# Altium PCB SPI LVDS Master.PcbDoc
Units mil, origin at the board's own origin, x right, y up, seen from the top; angles counter-clockwise.
Board outline 2040 x 1580 mil, 4 copper layers (Top Layer, L2 - GND, L3 - POWER, Bottom Layer), stack 23.756 mil thick; 26 components, 29 nets, 104 pads, 29 vias.
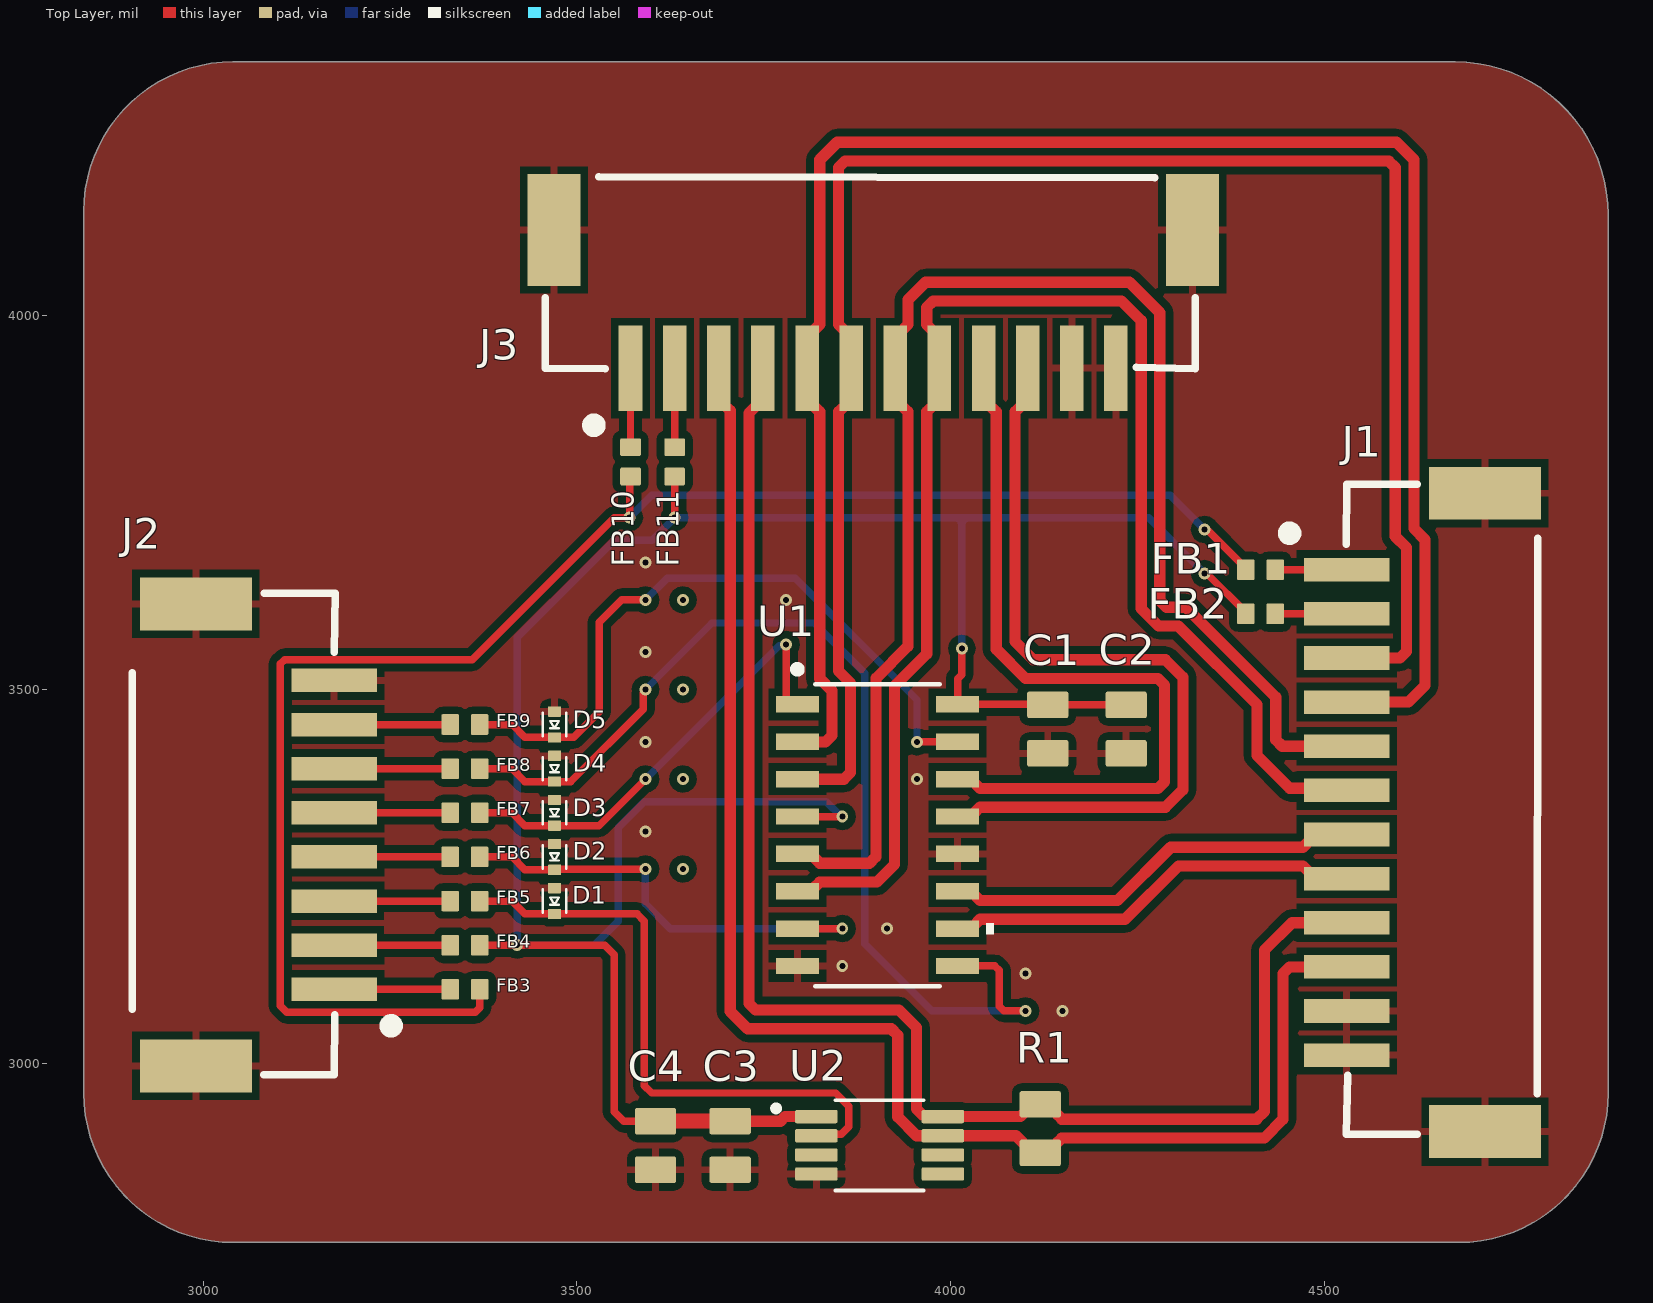
[diagram p0: Top Layer view]
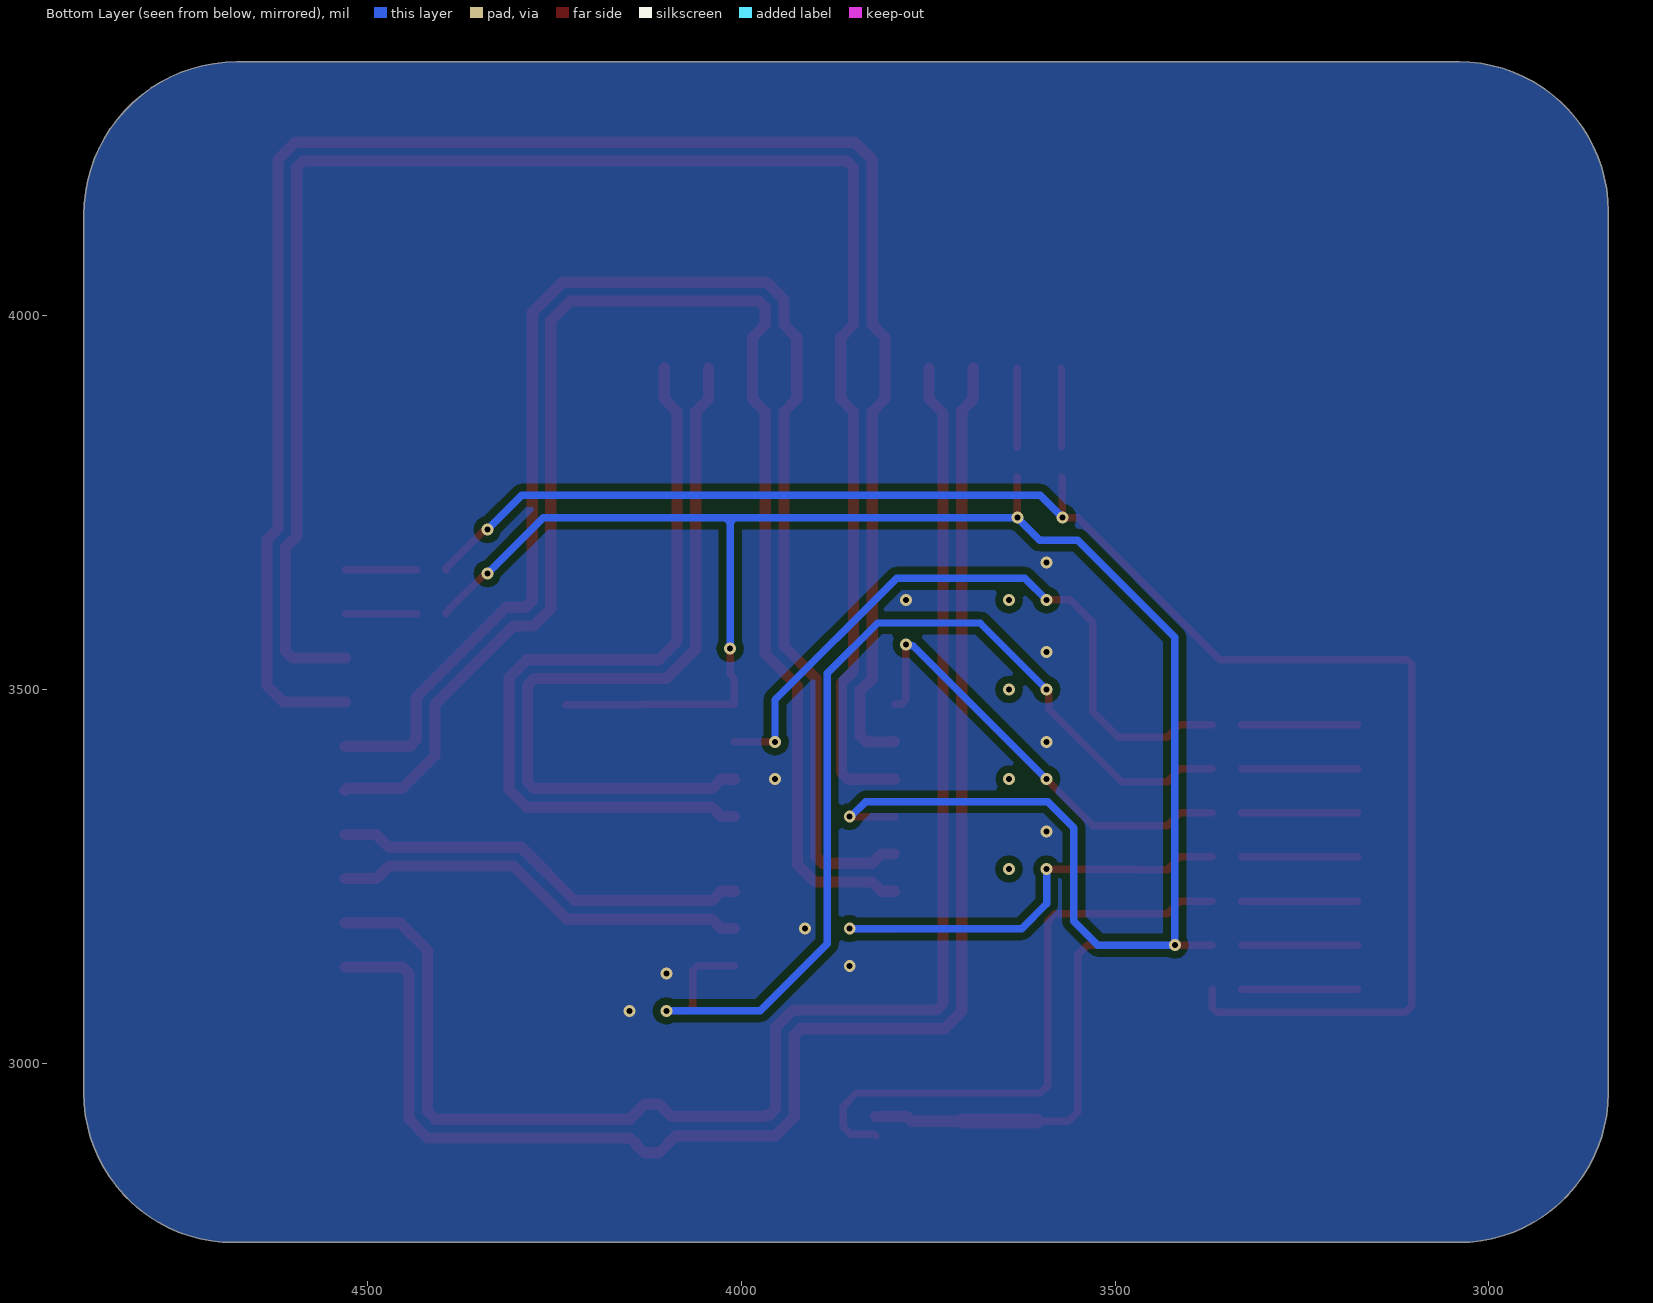
[diagram p1: Bottom Layer view, seen from below]
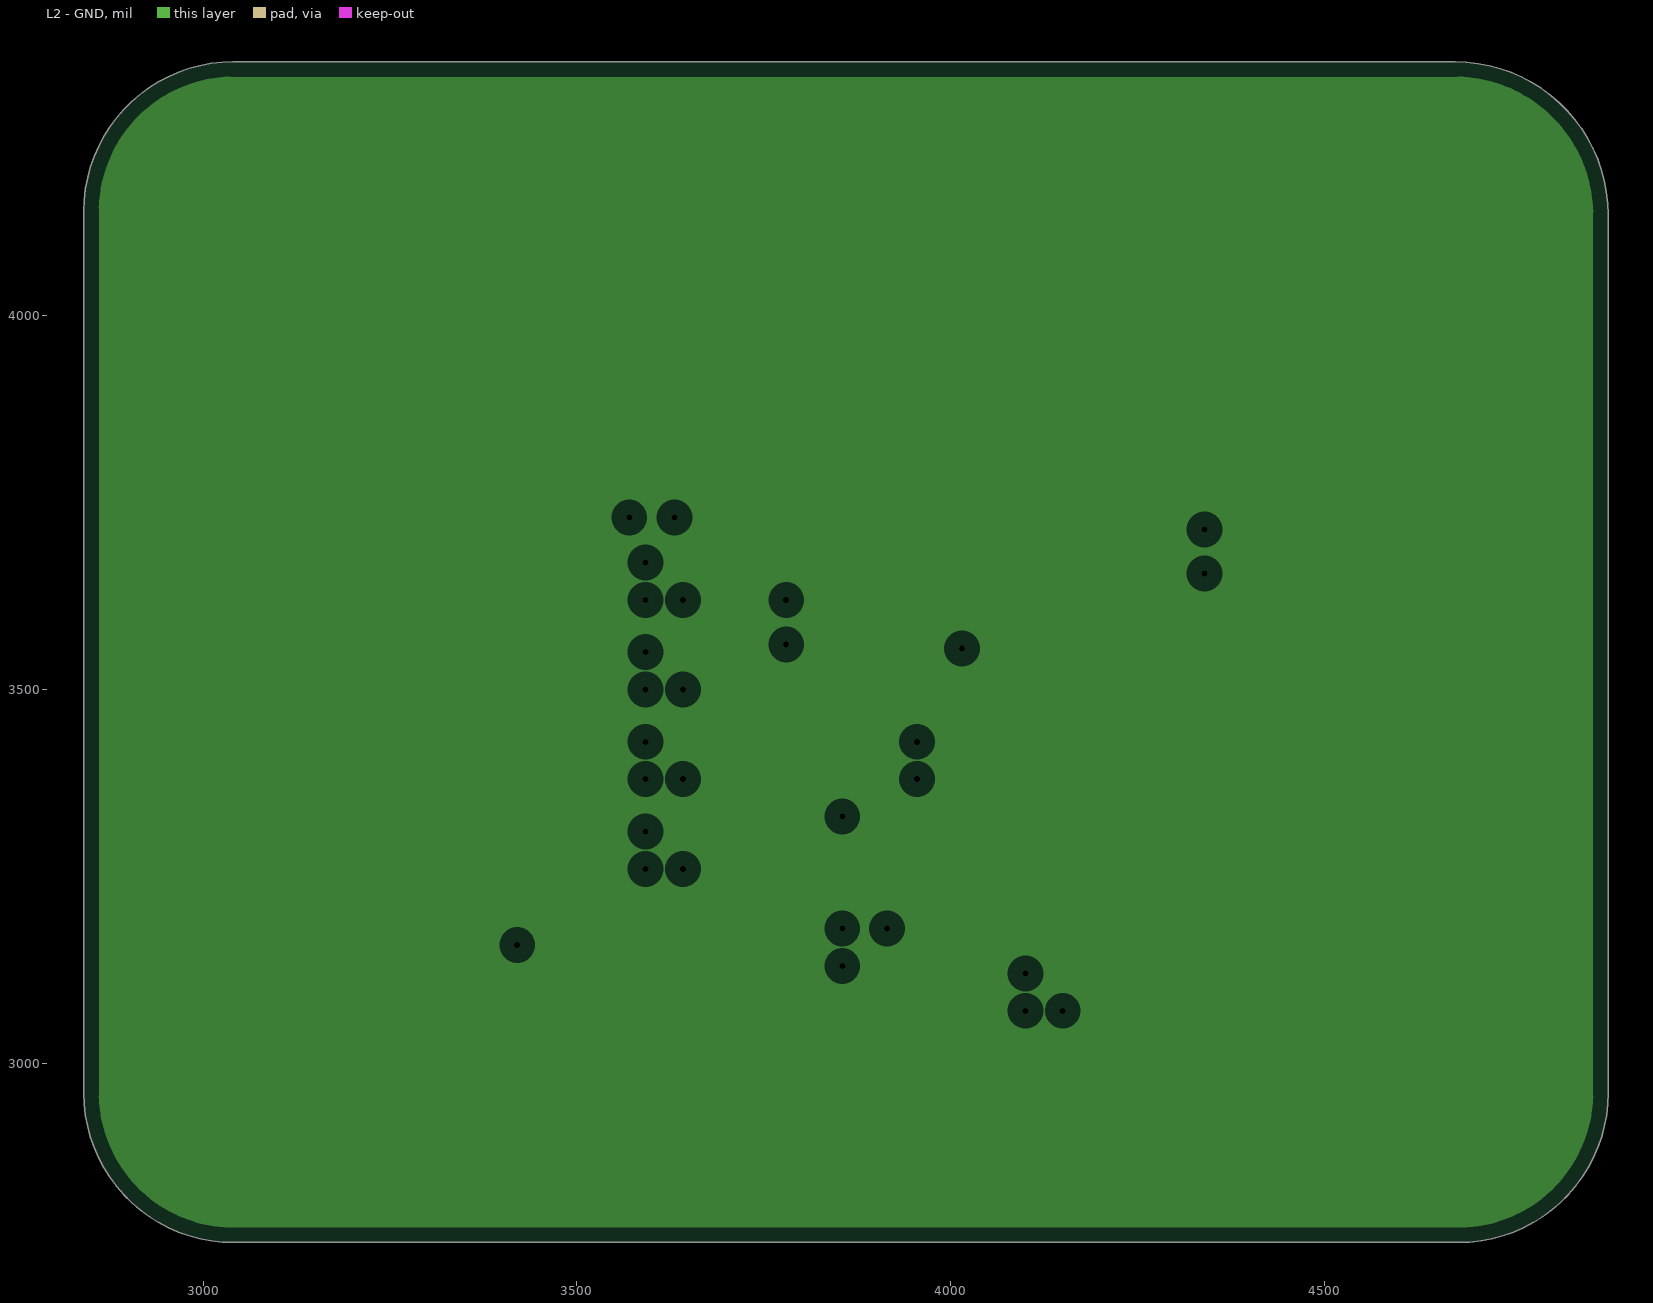
[diagram p2: L2 - GND, clearances drawn from the general rule]
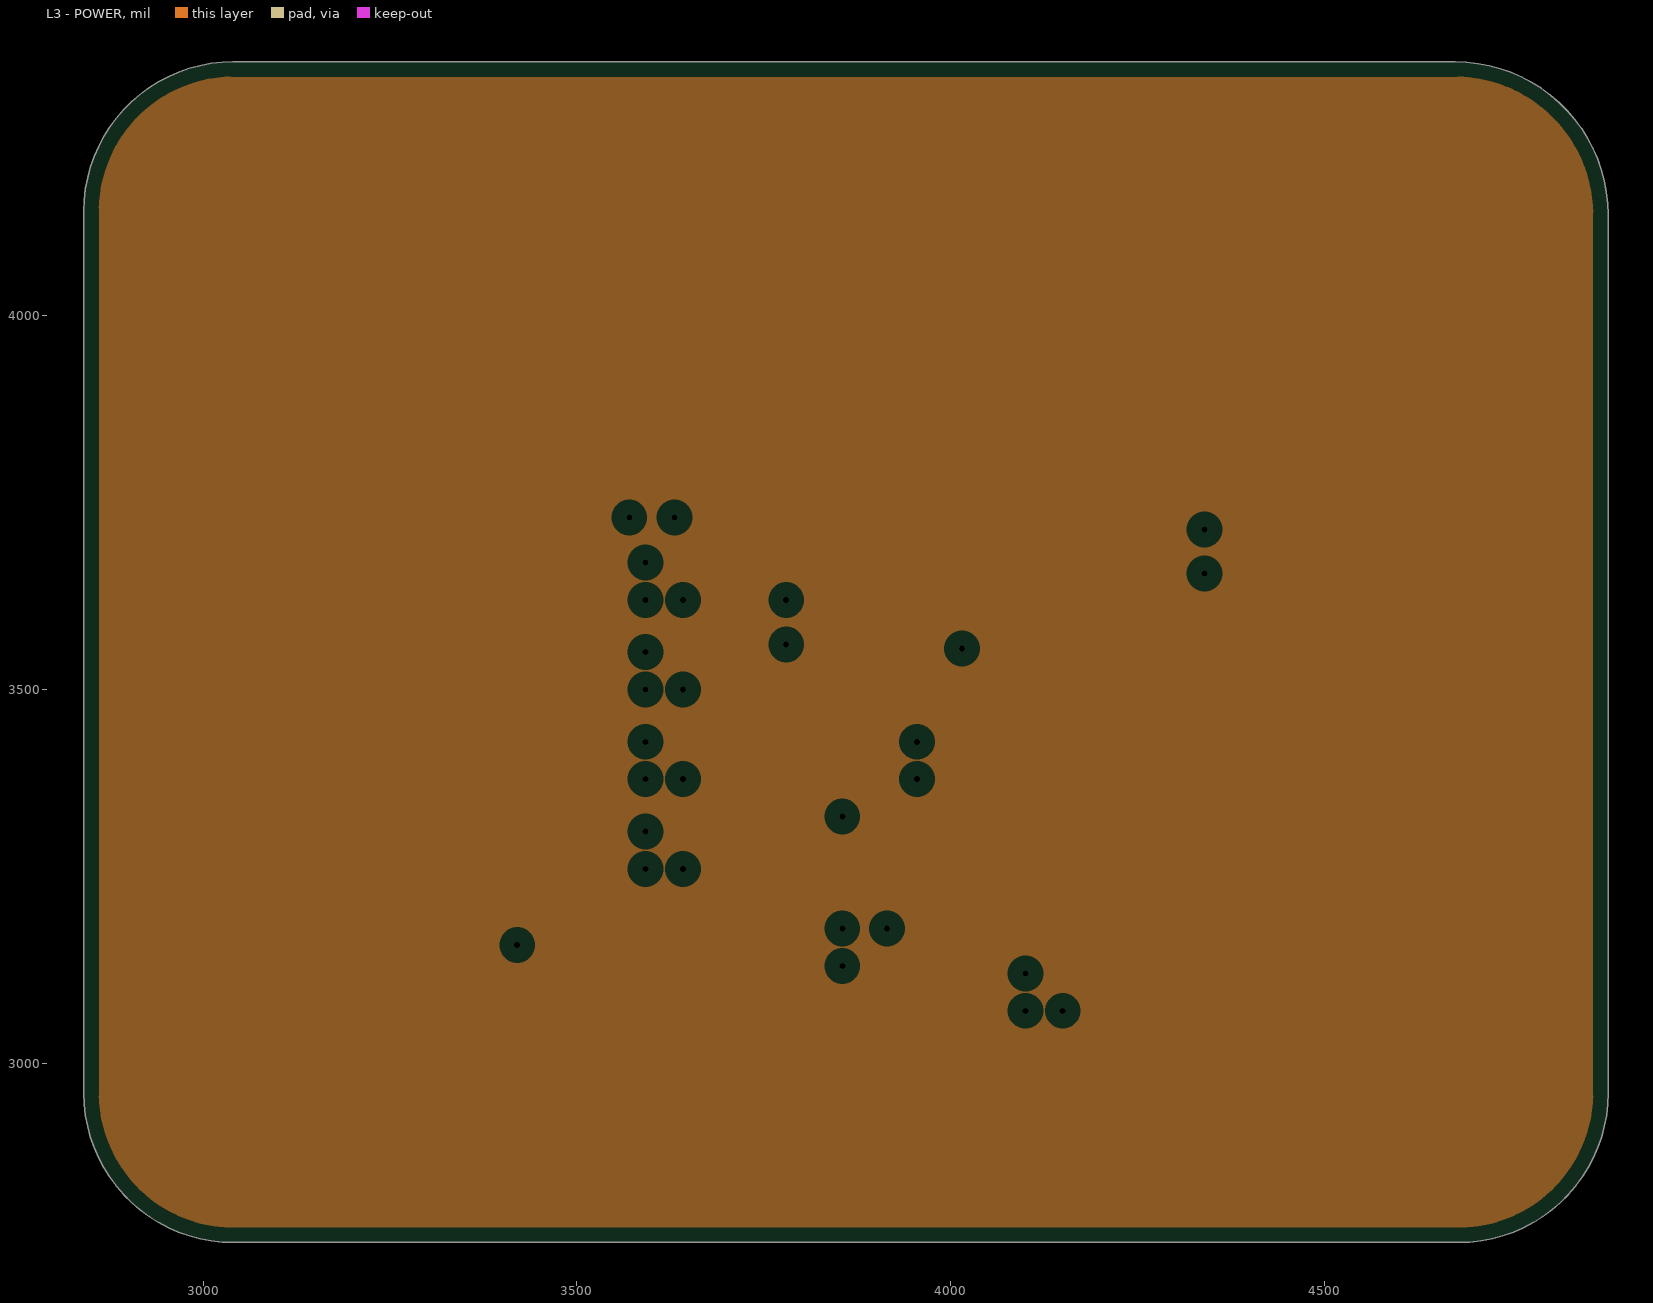
[diagram p3: L3 - POWER, clearances drawn from the general rule]
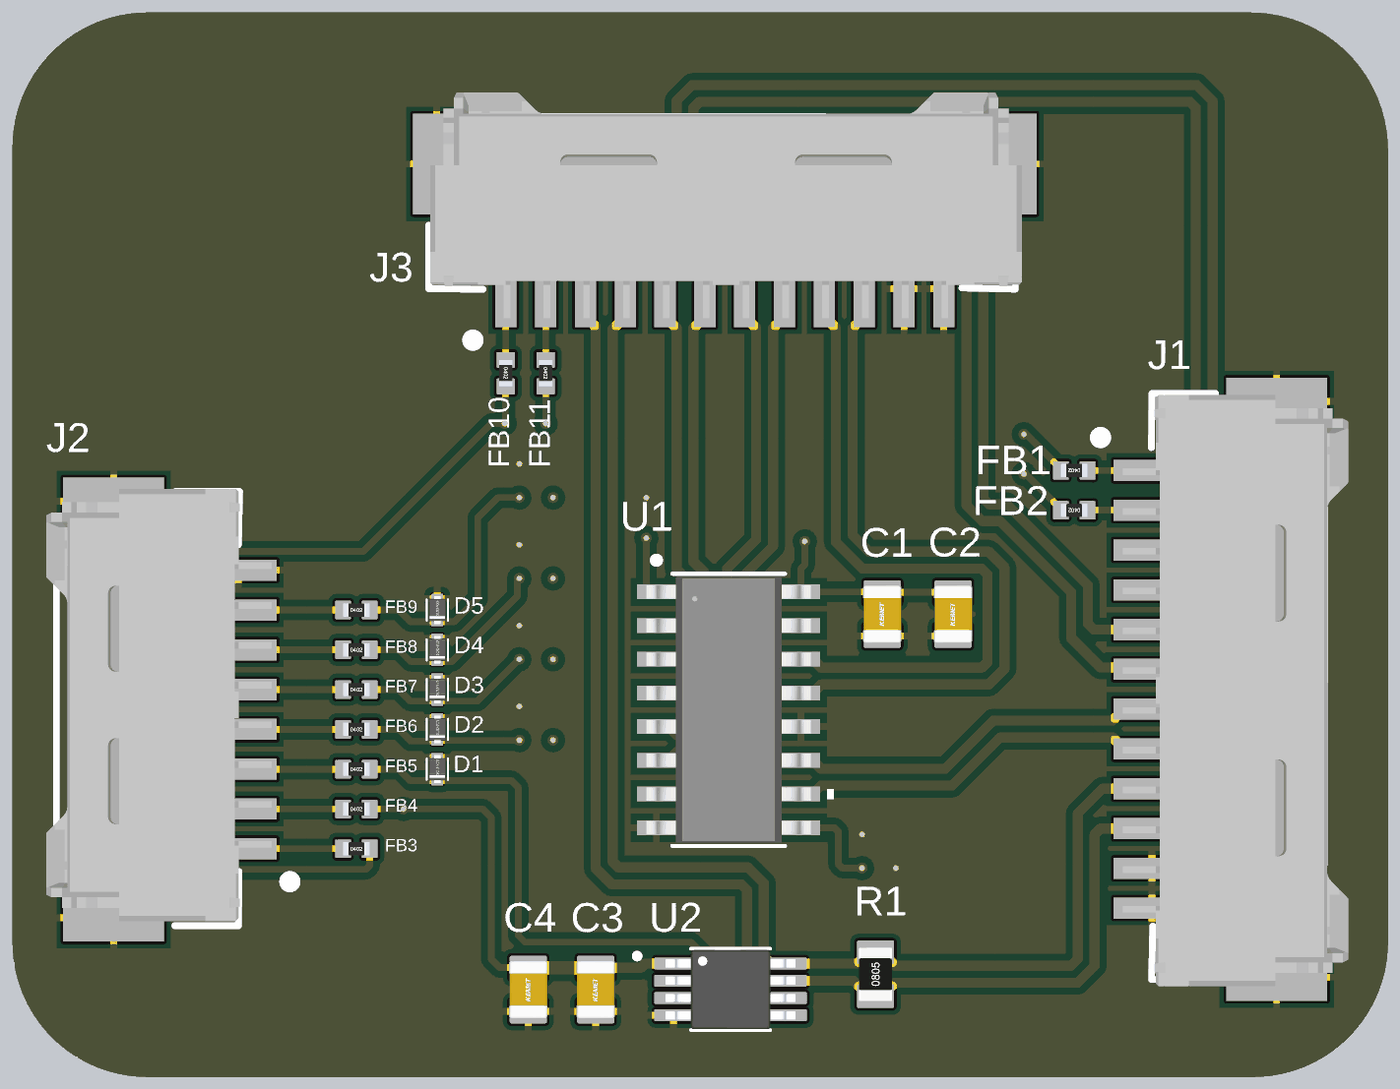
[diagram p4: 3D render of the assembled board from above, using the file's embedded part models]

## Layer stack, top to bottom
Top Solder: solder mask 0.4, Solder Resist, Dk 3.5
Top Layer: signal copper 1.4
Dielectric 2: prepreg 2.8, PP-006, Dk 4.1
L2 - GND: plane copper 1.378
Dielectric 1: dielectric 12.6, FR-4, Dk 4.8
L3 - POWER: plane copper 1.378
Dielectric 5: prepreg 2.8, PP-006, Dk 4.1
Bottom Layer: signal copper 1.4
Bottom Solder: solder mask 0.4, Solder Resist, Dk 3.5

## Board outline
2840,2960 2840,4140 cw(c3040,4140) 3040,4340 4675.15,4340 cw(c4675.15,4135.15) 4880,4135.15 4880,2960 cw(c4680,2960) 4680,2760 3040,2760 cw(c3040,2960)

## Design rules (kind name [scope] priority, off if disabled: settings)
Clearance [All] p1: gap=10 ignorepadtopadclearanceinfootprint=FALSE except(0: Arc-Hole Track-Hole SMDPad-Hole THPad-Hole Via-Hole Fill-Hole Poly-Hole Region-Hole Text-Hole; 5: Arc-SMDPad Track-SMDPad SMDPad-SMDPad)
DiffPairsRouting [All] p1: maxlimit=10 minlimit=10 mostfreqgap=10 toplayer_minwidth=15 toplayer_maxwidth=15 toplayer_prefwidth=15 bottomlayer_minwidth=15 bottomlayer_maxwidth=15 bottomlayer_prefwidth=15 maxuncoupledlength=500
PlaneClearance [All] p1: clearance=20
PlaneConnect [All] p1: planeconnectstyle=Relief reliefexpansion=20 reliefentries=4 reliefconductorwidth=10 reliefairgap=10
PolygonConnect [All] p1: thpad.connectstyle=Relief thpad.reliefconductorwidth=10 thpad.reliefentries=4 thpad.polygonreliefangle="90 Angle" thpad.airgapwidth=10 smdpad.connectstyle=Relief smdpad.reliefconductorwidth=10 smdpad.reliefentries=4 smdpad.polygonreliefangle="90 Angle" smdpad.airgapwidth=10 via.connectstyle=Direct via.reliefconductorwidth=10 via.reliefentries=4 via.polygonreliefangle="90 Angle" via.airgapwidth=10
RoutingVias [All] p1: holewidth=28 width=50 viastyle="Through Hole" minholewidth=28 minwidth=50 maxholewidth=28 maxwidth=50
SolderMaskExpansion [All] p1: expansion=4 istentingtop=FALSE
Width [All] p1: maxlimit=100 minlimit=10 preferedwidth=10
27 further rules are at their usual default settings.

## Classes and differential pairs
component class "SPI LVDS Master": C1 C2 C3 C4 FB2 FB3 FB4 FB5 FB6 FB7 FB8 FB9 FB10 FB11 J1 J2 J3 R1 U1 U2
differential pair SCLK: +SCLK_P -SCLK_N
differential pair MOSI: +MOSI_P -MOSI_N
differential pair MISO: +MISO_P -MISO_N
differential pair \C\S\2\: +\C\S\2\_P -\C\S\2\_N
differential pair \C\S\1\: +\C\S\1\_P -\C\S\1\_N

## Components (designator, comment, footprint, x,y, rotation, side; value= is the part's Value field where it differs from the comment)
C1 "CAP_0.1uF_50V_0805" CAP0805 4130,3447 r90 top value=0.1μF
C2 "CAP_1000pF_50V_0805" CAP0805 4235,3447 r90 top value=1000pF
C3 "CAP_0.1uF_50V_0805" CAP0805 3705,2889.76 r90 top value=0.1μF
C4 "CAP_1000pF_50V_0805" CAP0805 3605,2889.76 r90 top value=1000pF
D1 "TVS_DIODE_UNIDIR_3.3V_7A" SOD-923 3470,3216.89 r90 top
D2 "TVS_DIODE_UNIDIR_3.3V_7A" SOD-923 3470,3275.94 r90 top
D3 "TVS_DIODE_UNIDIR_3.3V_7A" SOD-923 3470,3335 r90 top
D4 "TVS_DIODE_UNIDIR_3.3V_7A" SOD-923 3470,3394.06 r90 top
D5 "TVS_DIODE_UNIDIR_3.3V_7A" SOD-923 3470,3453.11 r90 top
FB1 "FERRITE_BEAD_600OHM_0402" RES0402 4414.69,3660.28 r180 top
FB2 "FERRITE_BEAD_600OHM_0402" RES0402 4414.69,3601.22 r180 top
FB3 "FERRITE_BEAD_600OHM_0402" RES0402 3350,3098.78 r0 top
FB4 "FERRITE_BEAD_600OHM_0402" RES0402 3350,3157.83 r0 top
FB5 "FERRITE_BEAD_600OHM_0402" RES0402 3350,3216.89 r0 top
FB6 "FERRITE_BEAD_600OHM_0402" RES0402 3350,3275.94 r0 top
FB7 "FERRITE_BEAD_600OHM_0402" RES0402 3350,3335 r0 top
FB8 "FERRITE_BEAD_600OHM_0402" RES0402 3350,3394.06 r0 top
FB9 "FERRITE_BEAD_600OHM_0402" RES0402 3350,3453.11 r0 top
FB10 "FERRITE_BEAD_600OHM_0402" RES0402 3571.61,3804.68 r270 top
FB11 "FERRITE_BEAD_600OHM_0402" RES0402 3630.67,3804.68 r270 top
J1 "CON_12M_SM_RA" MOLEX-5025851270 4530,3010.67 r270 top
J2 "CON_8M_SM_RA" MOLEX-5025850870 3175,3512.17 r90 top
J3 "CON_12M_SM_RA" MOLEX-5025851270 4221.22,3930 r0 top
R1 "RES_100Ω_0805_1%" RES0805 4120,2912.48 r90 top value=100Ω
U1 "SN65LVDS31MDREP" SOIC127P600X175-16N 3902.14,3305 r0 top
U2 "SN65LVDS179MDGKREP" SOP65P490X110-8N 3905,2890 r0 top

## Footprints (in the part's own frame and the unit in brackets; to place one, negate y for a bottom-side part, rotate by r counter-clockwise, add the part's x,y. Pads: shape width x height; smd on the part's side, far side on the other; paste and mask are expansions set on the pad)
CAP0805 [mm] "Chip Capacitor, Body 2.0x1.2mm, Height 0.45mm, IPC Medium Density"
  rrect15% 0.9x1.4 smd: 1(-0.825,0) 2(0.825,0)
  body extent -1.1,-0.73 1.1,0.73, height 1.39
MOLEX-5025850870 [mm]
  rect 1.8x3.8 smd: 0(-13.1,4.7) 0(2.6,4.7)
  rect 0.8x2.9 smd: 1(-10.5,0) 2(-9,0) 3(-7.5,0) 4(-6,0) 5(-4.5,0) 6(-3,0) 7(-1.5,0) 8(0,0)
  silkscreen extent -13.4,-2.14 2.97,6.86, body extent -13.23,-1.26 3.07,7.24, height 6.41
MOLEX-5025851270 [mm]
  rect 1.8x3.8 smd: 0(-19.1,4.7) 0(2.6,4.7)
  rect 0.8x2.9 smd: 1(-16.5,0) 2(-15,0) 3(-13.5,0) 4(-12,0) 5(-10.5,0) 6(-9,0) 7(-7.5,0) 8(-6,0) 9(-4.5,0) 10(-3,0) 11(-1.5,0) 12(0,0)
  silkscreen extent -19.4,-2.14 2.69,6.5, body extent -19.35,-1.1 2.95,7.4, height 6.41
RES0402 [mm] "Chip Resistor, Body 1x0.5mm, IPC Medium Density"
  rrect15% 0.6x0.7 smd: 1(-0.5,0) 2(0.5,0)
  body extent -0.5,-0.25 0.5,0.25, height 0.27
RES0805 [mm] "Chip Resistor, 2-Leads, Body 2.00x1.25mm, IPC High Density"
  rrect15% 0.9x1.4 smd: 1(-0.825,0) 2(0.825,0)
  body extent -1,-0.62 1,0.63, height 0.61
SOD-923 [mm]
  rrect15% 0.35x0.45 smd mask+0.05: 1(-0.437,0) 2(0.437,0)
  silkscreen extent -0.4,-0.4 0.4,0.4, body extent -0.53,-0.32 0.53,0.32, height 0.43
SOIC127P600X175-16N [mil]
  rect 57.28x21.97 smd paste+0 mask+0: 1(-107.14,175) 2(-107.14,125) 3(-107.14,75) 4(-107.14,25) 5(-107.14,-25) 6(-107.14,-75) 7(-107.14,-125) 8(-107.14,-175) 9(107.14,-175) 10(107.14,-125) 11(107.14,-75) 12(107.14,-25) 13(107.14,25) 14(107.14,75) 15(107.14,125) 16(107.14,175)
  silkscreen extent -112,-202 156,227, body extent -122,-197 122,197, height 69
SOP65P490X110-8N [mm]
  rrect25% 1.45x0.45 smd: 1(-2.15,0.975) 2(-2.15,0.325) 3(-2.15,-0.325) 4(-2.15,-0.975) 5(2.15,-0.975) 6(2.15,-0.325) 7(2.15,0.325) 8(2.15,0.975)
  silkscreen extent -3.62,-1.54 1.5,1.54, body extent -2.45,-1.5 2.45,1.5, height 1.1

## Part data
C1 C3: "CAP CER 0.1UF 50V X7R 0805", Dielectric=X7R, LCSC Part #=C49678, Manufacturer 1="Murata Electronics", Manufacturer Part Number 1=GCM21BR71H104KA37K, Package/Footprint=0805, Supplier Part Number 1=490-8049-1-ND, Voltage Rating=50V, Mounting Type=SMD, Supplier 1=Digi-Key
C2 C4: "CAP CER 1000pF 50V X7R 0805", Dielectric=X7R, Manufacturer 1=Samsung, Manufacturer Part Number 1=CL21B102KBANNNC, Package/Footprint=0805, Supplier Part Number 1=1276-1020-1-ND, Voltage Rating=50V, Mounting Type=SMD, Supplier 1=Digi-Key
D1 D2 D3 D4 D5: "TVS DIODE 3.3VWM 11VC SOD923", Manufacturer 1="Central Semiconductor Corp", Manufacturer Part Number 1="CMATVS3V3 TR PBFREE", Package/Footprint=SOD-923, Supplier Part Number 1=1514-CMATVS3V3TRPBFREECT-ND, Voltage - Breakdown (Min)=5V, Voltage - Clamping (Max) @ Ipp=11V, Voltage - Reverse Standoff (Typ)=3.3V, Mounting Type=SMD, Supplier 1=Digi-Key
FB1 FB2 FB3 FB4 FB5 FB6 FB7 FB8 FB9 FB10 FB11: "FIXED IND 1UH 3.8A 33 MOHM SMD", Current Rating (Max)=300mA, DC Resistance (DCR) (Max)=520mΩ, Impedance @ Frequency="600Ω @ 100 MHz", Manufacturer 1="TDK Corporation", Manufacturer Part Number 1=MMZ1005S601CT000, Package=0402, Package/Footprint=SMD, Supplier Part Number 1=445-2162-1-ND, Impedance=600Ω, Mounting Type=SMD, Supplier 1=Digi-Key
J1 J3: "CONN HEADER SMD RIGHT ANGLE 1.5MM PITCH", Current Rating=2A, Manufacturer 1=Molex, Manufacturer Part Number 1=502585-1270, Package/Footprint=SMD, Supplier Part Number 1=WM14473CT-ND, Voltage Rating=100V, Family=CLIK-Mate, Mounting Type=SMD, Orientation="Right Angle", Pitch=1.5mm, Supplier 1=Digi-Key
J2: "CONN HEADER SMD RIGHT ANGLE 1.5 MM PITCH", Current Rating=2A, Package/Footprint=SMD, Supplier Part Number 1=WM14471CT-ND, Voltage Rating=100V, Family=CLIK-Mate, Mounting Type=SMD, Orientation="Right Angle", Pitch=1.5mm, Supplier 1=Digi-Key
R1: "RES 100 OHM 1% 1/8W 0805", LCSC Part #=C1790, Manufacturer 1="Vishay Dale", Manufacturer Part Number 1=CRCW0805100RFKEA, Package/Footprint=0805, Supplier Part Number 1=541-100CCT-ND, Mounting Type=SMD, Supplier 1=Digi-Key
U1: "IC DRIVER 4/0 16SOIC", Package=None, Supplier Part Number 1=296-36715-1-ND, Availability=Unavailable, MP=SN65LVDS31MDREP, Price=None, Supplier 1=Digi-Key
U2: "Enhanced Product High-Speed Differential Line Drivers And Receivers 8-VSSOP -55 to 125", Package="VSSOP-8 Texas Instruments", Supplier Part Number 1=296-22243-1-ND, Digi-Key_Part_Number=296-22243-1-ND, MF="Texas Instruments", MP=SN65LVDS179MDGKREP, Purchase-URL=https://pricing.snapeda.com/search/part/SN65LVDS179MDGKREP/?ref=eda, SnapEDA_Link=https://www.snapeda.com/parts/SN65LVDS179MDGKREP/Texas%20Instruments/view-part/383554/?ref=snap, Supplier 1=Digi-Key

## Via types
v1: diameter 16, hole 8, Top Layer to Bottom Layer, tented both sides, 29 vias

## Nets (pads, with @x,y where several pads share a name; then routed paths per layer and width w, separated by ;. In a path a pad name is that pad's centre, name@x,y a point inside that pad or via, vN(x,y) a via of type N, cw(c..) or ccw(c..) an arc to the next point about the centre after c; other vN are vias at no path point)
3V3: C1.2 C2.2 C3.2 C4.2 FB2.2 FB4.2 FB11.2 U1.4 U1.16 U2.1 | length 3392.6
  Top Layer w10: FB4.2 v1(3420,3157.83) 3537.17,3157.83 3550,3145 3550,2935 3562.76,2922.24 C4.2 ; v1(3630.67,3730) FB11.2 ; U1.4 v1(3855,3330) ; v1(4015,3555) 4015,3520 4009.28,3514.28 U1.16 4129.48,3480 C1.2 C2.2 ; v1(4340,3655) 4341.15,3653.85 4344.34,3653.85 4395,3603.19 FB2.2
  Top Layer w15: C3.2 3772.24,2922.24 3778.39,2928.39 U2.1
  Top Layer w20: C4.2 C3.2
  Bottom Layer w10: v1(3855,3330) 3853.38,3330 3833.38,3350 3590,3350 3555,3315 3555,3190 3522.83,3157.83 v1(3420,3157.83) 3420,3570 3550,3700 3600.67,3700 v1(3630.67,3730) 4005,3730 ; v1(4015,3555) 4015,3720 ; v1(4340,3655) 4265,3730 4025,3730 ; 4005,3730 cw(c4005,3720) 4015,3720 ; 4005,3730 4025,3730 ; 4015,3720 cw(c4025,3720) 4025,3730
5V: FB1.2 FB3.2 FB10.2 | length 2239.5
  Top Layer w10: FB3.2 3369.68,3073.89 3363.83,3068.03 3111.7,3068.03 3102.91,3076.82 3102.91,3534.14 3108.77,3540 3360,3540 3550,3730 v1(3570,3730) 3570.81,3730.81 FB10.2@3570.81,3784.19 ; FB10.2@3570.31,3783.69 FB10.2 ; v1(4340,3714.06) 4341.15,3712.91 4344.34,3712.91 4395,3662.24 FB1.2
  Bottom Layer w10: v1(3570,3730) 3599.96,3759.96 4294.09,3759.96 v1(4340,3714.06)
\C\S\1\: D4.1 FB8.2 U1.9 | length 1409.8
  Top Layer w10: FB8.2 3413.11,3394.06 3430.33,3376.83 3491.83,3376.83 3588.65,3473.65 3588.65,3495.38 3591.65,3498.38 v1(3591.65,3500) ; U1.9 4059.14,3130 4065,3124.14 4065,3075.86 4070.86,3070 v1(4100,3070)
  Bottom Layer w10: v1(3591.65,3500) 3680.65,3589 3817.72,3589 3885,3521.72 3885,3159.87 3974.87,3070 v1(4100,3070)
\C\S\1\_N: J1.7 U1.11 | length 562.7
  Top Layer w15: U1.11 4026.93,3230 4030.42,3226.52 4030.42,3226.29 4039.21,3217.5 4223.17,3217.5 4294.59,3288.92 4471.63,3288.92 4488.66,3305.94 J1.7
\C\S\1\_P: J1.8 U1.10 | length 562.7
  Top Layer w15: U1.10 4026.93,3180 4030.42,3183.48 4030.42,3183.71 4039.21,3192.5 4233.53,3192.5 4304.95,3263.92 4471.63,3263.92 4488.66,3246.89 J1.8
\C\S\2\: D5.1 FB9.2 U1.15 | length 928.8
  Top Layer w10: FB9.2 3413.11,3453.11 3430.33,3435.89 D5.1 3495.89,3435.89 3530,3470 3530,3590 3560,3620 v1(3591.65,3620) ; v1(3955,3430) U1.15
  Bottom Layer w10: v1(3591.65,3620) 3620.65,3649 3792.01,3649 3955,3486.01 v1(3955,3430)
\C\S\2\_N: J3.10 U1.13 | length 1085
  Top Layer w15: U1.13 4026.93,3330 4030.42,3333.48 4030.42,3333.71 4039.21,3342.5 4287.75,3342.5 4311.18,3365.93 4311.18,3516.27 4287.75,3539.7 4110.66,3539.7 4086.08,3564.27 4086.08,3871.63 4103.11,3888.66 J3.10
\C\S\2\_P: J3.9 U1.14 | length 1043.6
  Top Layer w15: U1.14 4026.93,3380 4030.42,3376.52 4030.42,3376.29 4039.21,3367.5 4277.39,3367.5 4286.18,3376.29 4286.18,3505.91 4277.39,3514.7 4100.3,3514.7 4061.08,3553.92 4061.08,3871.63 4044.06,3888.66 J3.9
GND: C1.1 C2.1 C3.1 C4.1 D1.2 D2.2 D3.2 D4.2 D5.2 J1.0 J1.11 J1.12 J2.0 J2.8 J3.0 J3.11 J3.12 U1.8 U1.12 U2.4
  other v1: 4150,3070 4100,3120 3855,3130 3915,3180 3591.65,3310 3955,3380 3591.65,3430 3591.65,3550 3780,3620 3591.65,3670
MISO: D1.1 FB5.2 U2.2 | length 812.9
  Top Layer w10: FB5.2 3413.11,3216.89 3430.33,3199.67 3580.33,3199.67 3590,3190 3590,2970 3600,2960 3846.06,2960 3863.9,2942.16 3863.9,2914.61 3853.81,2904.53 3822.09,2904.53 U2.2
MISO_N: J1.10 J3.3 R1.1 U2.7 | length 2052.3
  Top Layer w15: J3.3 3689.72,3888.66 3705,3873.39 3705,3069.43 3728.43,3046 3920.6,3046 3929.38,3037.21 3929.38,2927.8 3954.38,2902.8 4087.36,2902.8 4110.16,2880 R1.1 4129.84,2880 4140.06,2890.22 4140.06,2891.19 4148.85,2899.98 4419.98,2899.98 4445,2925 4445,3119.99 4453.79,3128.78 J1.10
MISO_P: J1.9 J3.4 R1.2 U2.8 | length 2035.5
  Top Layer w15: J3.4 3748.78,3888.66 3730,3869.88 3730,3079.79 3738.79,3071 3930.95,3071 3954.38,3047.57 3954.38,2938.53 3963.17,2929.74 3968.6,2929.74 3969.96,2928.39 4093.58,2928.39 4110.16,2944.96 R1.2 4129.84,2944.96 4140.06,2934.74 4140.06,2933.77 4148.85,2924.98 4409.62,2924.98 4420,2935.36 4420,3151.1 4456.74,3187.83 J1.9
MOSI: D2.1 FB6.2 U1.7 | length 613.4
  Top Layer w10: FB6.2 3413.11,3275.94 3430.33,3258.72 D2.1 3470.64,3259.36 3591.01,3259.36 v1(3591.65,3260) ; U1.7 v1(3855,3180)
  Bottom Layer w10: v1(3591.65,3260) 3591.65,3213.35 3625,3180 v1(3855,3180)
MOSI_N: J1.5 J3.7 U1.5 | length 2004.3
  Top Layer w15: U1.5 3812.66,3280 3816.14,3276.52 3816.14,3276.29 3824.93,3267.5 3891.21,3267.5 3900,3276.29 3900,3515 3942.97,3557.97 3942.97,3871.63 3925.94,3888.66 J3.7 3925.94,3971.34 3942.97,3988.37 3942.97,4021.57 3966.4,4045 4239.16,4045 4280,4004.16 4280,3618.79 4288.79,3610 4315,3610 4435,3490 4435,3432.84 4443.79,3424.06 J1.5
MOSI_P: J1.6 J3.8 U1.6 | length 2024.7
  Top Layer w15: U1.6 3812.66,3230 3816.14,3233.48 3816.14,3233.71 3824.93,3242.5 3901.57,3242.5 3925,3265.93 3925,3504.64 3967.97,3547.62 3967.97,3871.63 3985,3888.66 J3.8 3985,3971.34 3967.97,3988.37 3967.97,4011.21 3976.76,4020 4228.8,4020 4255,3993.8 4255,3608.43 4278.43,3585 4304.64,3585 4410,3479.64 4410,3411.74 4453.79,3367.95 4527.05,3367.95 J1.6
NetFB1_1: FB1.1 J1.1 | length 95.6
  Top Layer w10: FB1.1 J1.1
NetFB2_1: FB2.1 J1.2 | length 95.6
  Top Layer w10: FB2.1 J1.2
NetFB3_1: FB3.1 J2.1 | length 155.3
  Top Layer w10: J2.1 FB3.1
NetFB4_1: FB4.1 J2.2 | length 155.3
  Top Layer w10: J2.2 FB4.1
NetFB5_1: FB5.1 J2.3 | length 155.3
  Top Layer w10: J2.3 FB5.1
NetFB6_1: FB6.1 J2.4 | length 155.3
  Top Layer w10: J2.4 FB6.1
NetFB7_1: FB7.1 J2.5 | length 155.3
  Top Layer w10: J2.5 FB7.1
NetFB8_1: FB8.1 J2.6 | length 155.3
  Top Layer w10: J2.6 FB8.1
NetFB9_1: FB9.1 J2.7 | length 155.3
  Top Layer w10: J2.7 FB9.1
NetFB10_1: FB10.1 J3.1 | length 105.6
  Top Layer w10: FB10.1 J3.1
NetFB11_1: FB11.1 J3.2 | length 105.6
  Top Layer w10: FB11.1 J3.2
SCLK: D3.1 FB7.2 U1.1 | length 609.3
  Top Layer w10: FB7.2 3413.11,3335 3430.33,3317.78 3529.42,3317.78 v1(3591.65,3380) ; v1(3780,3560) 3780,3485.98 3785.98,3480 U1.1
  Bottom Layer w10: v1(3591.65,3380) 3770.5,3558.85 3778.85,3558.85 v1(3780,3560)
SCLK_N: J1.3 J3.6 U1.3 | length 2395.3
  Top Layer w15: U1.3 3857.35,3380 3866.14,3388.79 3866.14,3508.59 3849.86,3524.87 3849.86,3871.63 3866.89,3888.66 3866.89,3971.34 3849.86,3988.37 3849.86,4198.56 3858.65,4207.34 4586.21,4207.34 4595,4198.56 4595,3705 4610,3690 4610,3550.95 4601.21,3542.17 J1.3
SCLK_P: J1.4 J3.5 U1.2 | length 2479.6
  Top Layer w15: U1.2 3795.3,3429.7 3832.35,3429.7 3841.14,3438.48 3841.14,3498.23 3824.86,3514.51 3824.86,3871.63 3807.83,3888.66 3807.83,3971.34 3824.86,3988.37 3824.86,4208.91 3848.29,4232.34 4596.57,4232.34 4620,4208.91 4620,3715.36 4635,3700.36 4635,3505.56 4612.55,3483.11 J1.4
pads on no net: U2.3 U2.5 U2.6
copper on no net:
  other v1: 3641.65,3260 3641.65,3380 3641.65,3500 3641.65,3620

## Polygon pours and split planes (outlines as drawn)
GND on Bottom Layer "GND_L04_P02" (solid, pour order 1): 2840,2960 2840,4140 cw(c3040,4140) 3040,4340 4675.15,4340 cw(c4675.15,4135.15) 4880,4135.15 4880,2960 cw(c4680,2960) 4680,2760 3040,2760 cw(c3040,2960)
GND on Top Layer "GND_L01_P01" (solid, pour order 0): 2840,2960 2840,4140 cw(c3040,4140) 3040,4340 4675.15,4340 cw(c4675.15,4135.15) 4880,4135.15 4880,2960 cw(c4680,2960) 4680,2760 3040,2760 cw(c3040,2960)
no net on L3 - POWER (split plane): 4687.24,4319.6 4699.28,4318.42 4711.21,4316.45 4722.99,4313.7 4734.57,4310.19 4745.89,4305.93 4756.9,4300.94 4767.57,4295.23 4777.85,4288.85 4787.68,4281.8 4797.03,4274.13 4805.86,4265.86 4814.13,4257.03 4821.8,4247.68 4828.85,4237.85 4835.23,4227.57 4840.94,4216.9 4845.93,4205.89 4850.19,4194.57 4853.7,4182.99 4856.45,4171.21 4858.42,4159.28 4859.6,4147.24 4859.98,4135.88 4859.9,4135.15 4859.9,2960 4859.97,2959.29 4859.61,2948.23 4858.46,2936.51 4856.54,2924.88 4853.86,2913.41 4850.44,2902.14 4846.29,2891.12 4841.43,2880.39 4835.88,2870 4829.66,2860 4822.8,2850.43 4815.33,2841.32 4807.28,2832.72 4798.68,2824.67 4789.57,2817.2 4780,2810.34 4770,2804.12 4759.61,2798.57 4748.88,2793.7 4737.86,2789.56 4726.59,2786.14 4715.12,2783.46 4703.49,2781.54 4691.77,2780.39 4680.71,2780.03 4680,2780.1 3040,2780.1 3039.29,2780.03 3028.23,2780.39 3016.51,2781.54 3004.88,2783.46 2993.41,2786.14 2982.14,2789.56 2971.12,2793.7 2960.39,2798.57 2950,2804.12 2940,2810.34 2930.43,2817.2 2921.32,2824.67 2912.72,2832.72 2904.67,2841.32 2897.2,2850.43 2890.34,2860 2884.12,2870 2878.57,2880.39 2873.7,2891.12 2869.56,2902.14 2866.14,2913.41 2863.46,2924.88 2861.54,2936.51 2860.39,2948.23 2860.03,2959.29 2860.1,2960 2860.1,4140 2860.03,4140.71 2860.39,4151.77 2861.54,4163.49 2863.46,4175.12 2866.14,4186.59 2869.56,4197.86 2873.7,4208.88 2878.57,4219.61 2884.12,4230 2890.34,4240 2897.2,4249.57 2904.67,4258.68 2912.72,4267.28 2921.32,4275.33 2930.43,4282.8 2940,4289.66 2950,4295.88 2960.39,4301.43 2971.12,4306.29 2982.14,4310.44 2993.41,4313.86 3004.88,4316.54 3016.51,4318.46 3028.23,4319.61 3039.29,4319.97 3040,4319.9 4675.15,4319.9 4675.88,4319.98
no net on L2 - GND (split plane): 4687.24,4319.6 4699.28,4318.42 4711.21,4316.45 4722.99,4313.7 4734.57,4310.19 4745.89,4305.93 4756.9,4300.94 4767.57,4295.23 4777.85,4288.85 4787.68,4281.8 4797.03,4274.13 4805.86,4265.86 4814.13,4257.03 4821.8,4247.68 4828.85,4237.85 4835.23,4227.57 4840.94,4216.9 4845.93,4205.89 4850.19,4194.57 4853.7,4182.99 4856.45,4171.21 4858.42,4159.28 4859.6,4147.24 4859.98,4135.88 4859.9,4135.15 4859.9,2960 4859.97,2959.29 4859.61,2948.23 4858.46,2936.51 4856.54,2924.88 4853.86,2913.41 4850.44,2902.14 4846.29,2891.12 4841.43,2880.39 4835.88,2870 4829.66,2860 4822.8,2850.43 4815.33,2841.32 4807.28,2832.72 4798.68,2824.67 4789.57,2817.2 4780,2810.34 4770,2804.12 4759.61,2798.57 4748.88,2793.7 4737.86,2789.56 4726.59,2786.14 4715.12,2783.46 4703.49,2781.54 4691.77,2780.39 4680.71,2780.03 4680,2780.1 3040,2780.1 3039.29,2780.03 3028.23,2780.39 3016.51,2781.54 3004.88,2783.46 2993.41,2786.14 2982.14,2789.56 2971.12,2793.7 2960.39,2798.57 2950,2804.12 2940,2810.34 2930.43,2817.2 2921.32,2824.67 2912.72,2832.72 2904.67,2841.32 2897.2,2850.43 2890.34,2860 2884.12,2870 2878.57,2880.39 2873.7,2891.12 2869.56,2902.14 2866.14,2913.41 2863.46,2924.88 2861.54,2936.51 2860.39,2948.23 2860.03,2959.29 2860.1,2960 2860.1,4140 2860.03,4140.71 2860.39,4151.77 2861.54,4163.49 2863.46,4175.12 2866.14,4186.59 2869.56,4197.86 2873.7,4208.88 2878.57,4219.61 2884.12,4230 2890.34,4240 2897.2,4249.57 2904.67,4258.68 2912.72,4267.28 2921.32,4275.33 2930.43,4282.8 2940,4289.66 2950,4295.88 2960.39,4301.43 2971.12,4306.29 2982.14,4310.44 2993.41,4313.86 3004.88,4316.54 3016.51,4318.46 3028.23,4319.61 3039.29,4319.97 3040,4319.9 4675.15,4319.9 4675.88,4319.98

## Silkscreen, mask and mechanical layers (free items; w line width, h text height)
Mechanical 1:
  the board outline again, w50

## Text inside footprints (layer, text, board x,y; h text height)
U1: Mechanical 13 "*" at 3826.14,3449 h50